# EAGLE board khanh_PB_ip5306_1.0 (EAGLE 6.6.0)
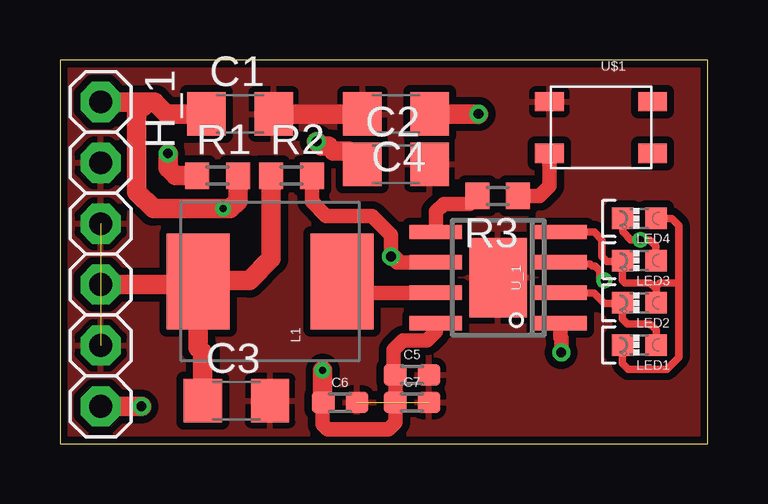
[diagram p0: board, top side]
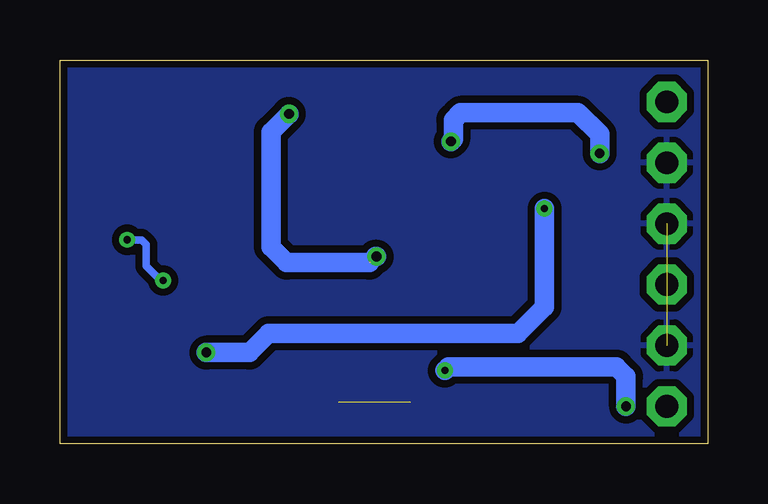
[diagram p1: board, bottom side, seen from below]

Size 27 x 16 mm. Coordinates in mm from the lower left corner, seen from the top.
Outline: 0,0 27,0 27,16 0,16 0,0
Copper layers (1*16): Top 0.035mm / dielectric 1.5mm / Bottom 0.035mm
Design rules "SparkFun-2-Layer-General-JLCPCB_kxnUsing": minimum track width 7mil, minimum drill 0.3mm, track to track 7mil, track to pad 7mil, pad to pad 7mil, via to via 7mil, smd to smd 7mil, copper to edge 7mil, drill to drill 7mil, minimum pad ring 7mil, minimum via ring 7mil, stop-mask expansion 0mil, vias tented up to drill 0.3mm, thermal gap 10mil

## Footprints (pad centres in the part's own frame; a part is rotated, then mirrored left to right if it is on the bottom)
C1206 = smd 1.6 x 1.8: 1 -1.4,0; 2 1.4,0
KXN_C0603 = smd 0.95 x 0.9: 1 -0.7,0; 2 0.7,0
HEADER_1X6_254 = drill 0.95 pad 1.676 octagon: 1 -6.35,0; 2 -3.81,0; 3 -1.27,0; 4 1.27,0; 5 3.81,0; 6 6.35,0
CKST_0603_0630_PACK = smd 2.63 x 4: P$1 -3,0; P$2 3,0
KXN_LED_0603 = smd 0.9 x 0.9: A 0.7,0; C -0.7,0
R0603 = smd 1 x 1.1: 1 -0.85,0; 2 0.85,0
KXN_BUTTON_3_4_2.5MM = smd 1.2 x 0.8: A -2.15,-1.075; A' 2.15,-1.075; B -2.15,1.075; B' 2.15,1.075
ESOP8 = smd 0.6 x 2.2: 1 -1.905,-2.6; 2 -0.635,-2.6; 3 0.635,-2.6; 4 1.905,-2.6; 5 1.905,2.6; 6 0.635,2.6; 7 -0.635,2.6; 8 -1.905,2.6 | smd 3.3 x 2.4: 9 0,0

## Placement (x,y rotation side)
C1  10uF  [C1206]  7.51,13.75 0 top
C2  10uF  [C1206]  14.01,11.65 0 top
C3  22uF  [C1206]  7.36,1.79 0 top
C4  22uF  [C1206]  14.01,13.75 180 top
C5  [KXN_C0603]  14.68,2.87 0 top
C6  [KXN_C0603]  11.68,1.71 0 top
C7  [KXN_C0603]  14.68,1.72 0 top
H_1  HEADER_BLACK_254_1X6  [HEADER_1X6_254]  1.7,7.9 270 top
L1  1R0  [CKST_0603_0630_PACK]  8.76,6.76 0 top
LED1  RED  [KXN_LED_0603]  24.16,4.11 0 top
LED2  RED  [KXN_LED_0603]  24.16,5.87 0 top
LED3  RED  [KXN_LED_0603]  24.16,7.63 0 top
LED4  RED  [KXN_LED_0603]  24.16,9.39 0 top
R1  2R0  [R0603]  6.57,11.17 0 top
R2  2R0  [R0603]  9.66,11.17 0 top
R3  10k  [R0603]  18.25,10.33 180 top
U$1  KAYO_GOLD_BUTTON_4_BLACK4_3X4X2.5_WHITE  [KXN_BUTTON_3_4_2.5MM]  22.56,13.18 0 top
U_1  IP5306  [ESOP8]  18.27,6.92 90 top

## Library data of the parts
C1 C2 = kxnStandard_capacitor; CC_SHOP: CongCo; INFO: C1206 10uF 25V
C3 C4 = kxnStandard_capacitor; CC_SHOP: CongCo; INFO: C1206 22uF 25V
C5-C7 = kxnStandard_capacitor; CC_SHOP: CongCo; INFO: C0603 22uF 10V
H_1 = kxnStandard_connector; CC_SHOP: CongCo
L1 = kxnStandard_inductor
LED1-LED4 = kxnStandard_led; CC_COST: 0.025; CC_ID: 522554271548; CC_LINK: https://item.taobao.com/item.htm?id=522554271548&skuId=5766142345185; CC_OPTION: 0603_红色(20只); CC_SHOP: CongCo; INFO: Led 0603 RED; JLC_PART_COST: 0.0056; JLC_PART_ID: C2286; JLC_PART_LINK: https://jlcpcb.com/partdetail/Hubei_KentoElec-KT0603R/C2286; KXN_ID: SA12131249
R1-R3 = kxnStandard_resistor; CC_SHOP: CongCo
U$1 = kxn_Standard_button_switch; INFO: BUTTON 4P SMD 3*4*2.5
U_1 = kxnStandard_IC_Function; CC_SHOP: CongCo

## Nets
BAT: C4.1 R2.2 U_1.6
GND: C1.2 C2.2 C3.2 C4.2 C5.2 C6.2 C7.2 H_1.2 H_1.3 H_1.5 U$1.B U_1.9
N$1: C2.1 R1.1
N$2: R3.1 U$1.A
N$4: L1.P$2 U_1.7
N$5: R3.2 U_1.5
N$6: LED1.A LED2.C U_1.2
N$7: LED1.C LED2.A LED3.C LED4.A U_1.4
N$8: LED3.A LED4.C U_1.3
OUT-5V: C5.1 C6.1 C7.1 H_1.6 U_1.8
VBAT: C3.1 H_1.4 L1.P$1 R2.1
VIN: C1.1 H_1.1 R1.2 U_1.1

## Tracks (layer width: path | path; a pad name or v marks a point on that pad's centre or on a via)
BAT  (via drill 0.4 pad 0.7)  (1 unrouted)
  Top 0.61: R2.2 10.51,10.09 11.1,9.5 13,9.5 13.8,8.7 13.8,7.85 13.85,7.8 13.95,7.8 14.2,7.55 | 14.2,7.55 U_1.6 | 14.2,7.55 14.05,7.55 v13.8,7.8
  Top 0.813: v17.45,13.75 C4.1
  Bottom 0.813: 14.1,7.55 17.55,7.55 18.2,8.2 18.2,13 v17.45,13.75 | v13.8,7.8 13.85,7.8
GND  (2 unrouted)
  Top 0.813: C1.2 C4.2
  pour Top (isolate 0.305, rank 6): 0,0 27,0 27,16 0,16
  pour Bottom (isolate 0.305, rank 6): 0,0 27,0 27,16 0,16
N$1  (via drill 0.4 pad 0.7)
  Top 0.813: R1.1 4.83,11.17 4.5,11.5 v4.5,12.1 | v10.7,12.6 10.9,12.4 11.2,12.4 11.4,12.2 12.06,12.2 C2.1
  Bottom 0.813: v4.5,12.1 4.5,12.9 5.4,13.8 10.3,13.8 10.6,13.5 10.6,12.7 v10.7,12.6
N$2
  Top 0.61: R3.1 19.98,10.33 20.4,10.75 20.4,12.1 U$1.A
N$4
  Top 0.61: U_1.7 12.23,6.29 L1.P$2
N$5
  Top 0.61: U_1.5 15.67,9.67 16,10 17.07,10 R3.2
N$6
  Top 0.305: LED1.A 24.86,4.74 24.6,5 23.65,5 23.45,5.2 LED2.C 23.44,5.85 22.7,5.85 22.27,6.29 U_1.2
N$7
  Top 0.305: LED4.A 25.51,9.39 25.8,9.1 25.8,6.7 | 25.8,6.7 25.8,3.6 25.3,3.1 23.7,3.1 23.45,3.35 LED1.C | U_1.4 22.27,8.82 22.6,8.5 22.6,7.8 22.8,7.6 23.43,7.6 LED3.C 23.45,6.8 23.55,6.7 24.6,6.7 24.86,6.44 LED2.A 24.86,6.56 25,6.7 25.8,6.7
N$8  (via drill 0.3 pad 0.6)
  Top 0.305: LED4.C 23.46,8.84 23.8,8.5 v24.2,8.5 24.6,8.5 24.85,8.25 LED3.A | v22.7,6.8 22.6,6.8 22.5,6.9 22.5,7.2 22.3,7.4 22.2,7.4 22.1,7.5 20.93,7.5 U_1.3
  Bottom 0.305: v24.2,8.5 23.6,8.5 23.4,8.3 23.4,7.4 22.8,6.8 v22.7,6.8
OUT-5V  (via drill 0.3 pad 0.6, 0.4 pad 0.7)
  Top 0.61: U_1.8 15.67,4.67 15.3,4.3 14.3,4.3 13.9,3.9 13.9,2.95 C5.1 C7.1 13.98,0.88 13.7,0.6 11.15,0.6 10.95,0.8 10.95,1.68 C6.1
  Top 0.813: H_1.6 v3.4,1.55 | v10.95,3.05 10.95,1.74 C6.1
  Bottom 0.813: v3.4,1.55 3.4,2.8 3.8,3.2 10.8,3.2 v10.95,3.05
VBAT
  Top 0.813: R2.1 8.81,7.71 7.9,6.8 5.8,6.8 L1.P$1 | H_1.4 5.63,6.63 L1.P$1 | L1.P$1 5.76,3.99 5.95,3.8 C3.1
VIN  (via drill 0.3 pad 0.6, 0.4 pad 0.7)
  Top 0.61: U_1.1 20.87,4.43 20.9,4.4 v20.9,3.8
  Top 0.813: H_1.1 3.65,14.25 | C1.1 4.45,13.75 3.95,14.25 3.65,14.25 | 3.65,14.25 3.2,13.8 3.2,10.5 3.9,9.8 v6.8,9.8 7.1,9.8 7.42,10.12 R1.2
  Bottom 0.813: v6.8,9.8 6.8,5.7 7.9,4.6 18.3,4.6 19.1,3.8 v20.9,3.8